# EAGLE board board (EAGLE 8.6.0)
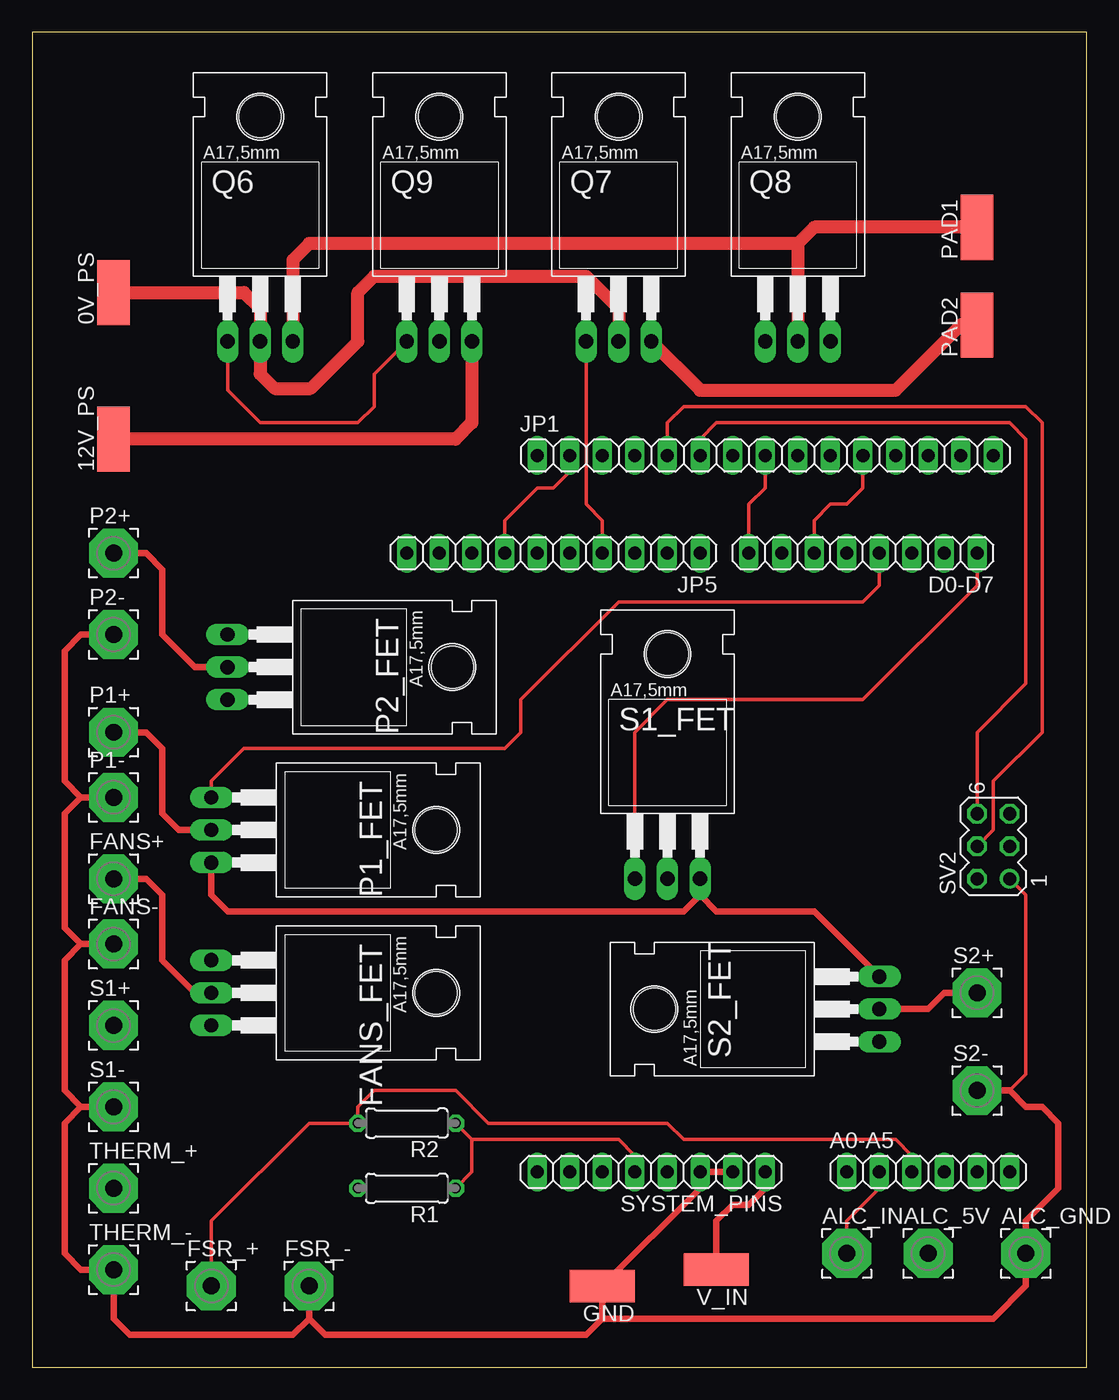
[diagram p0: board, top side]
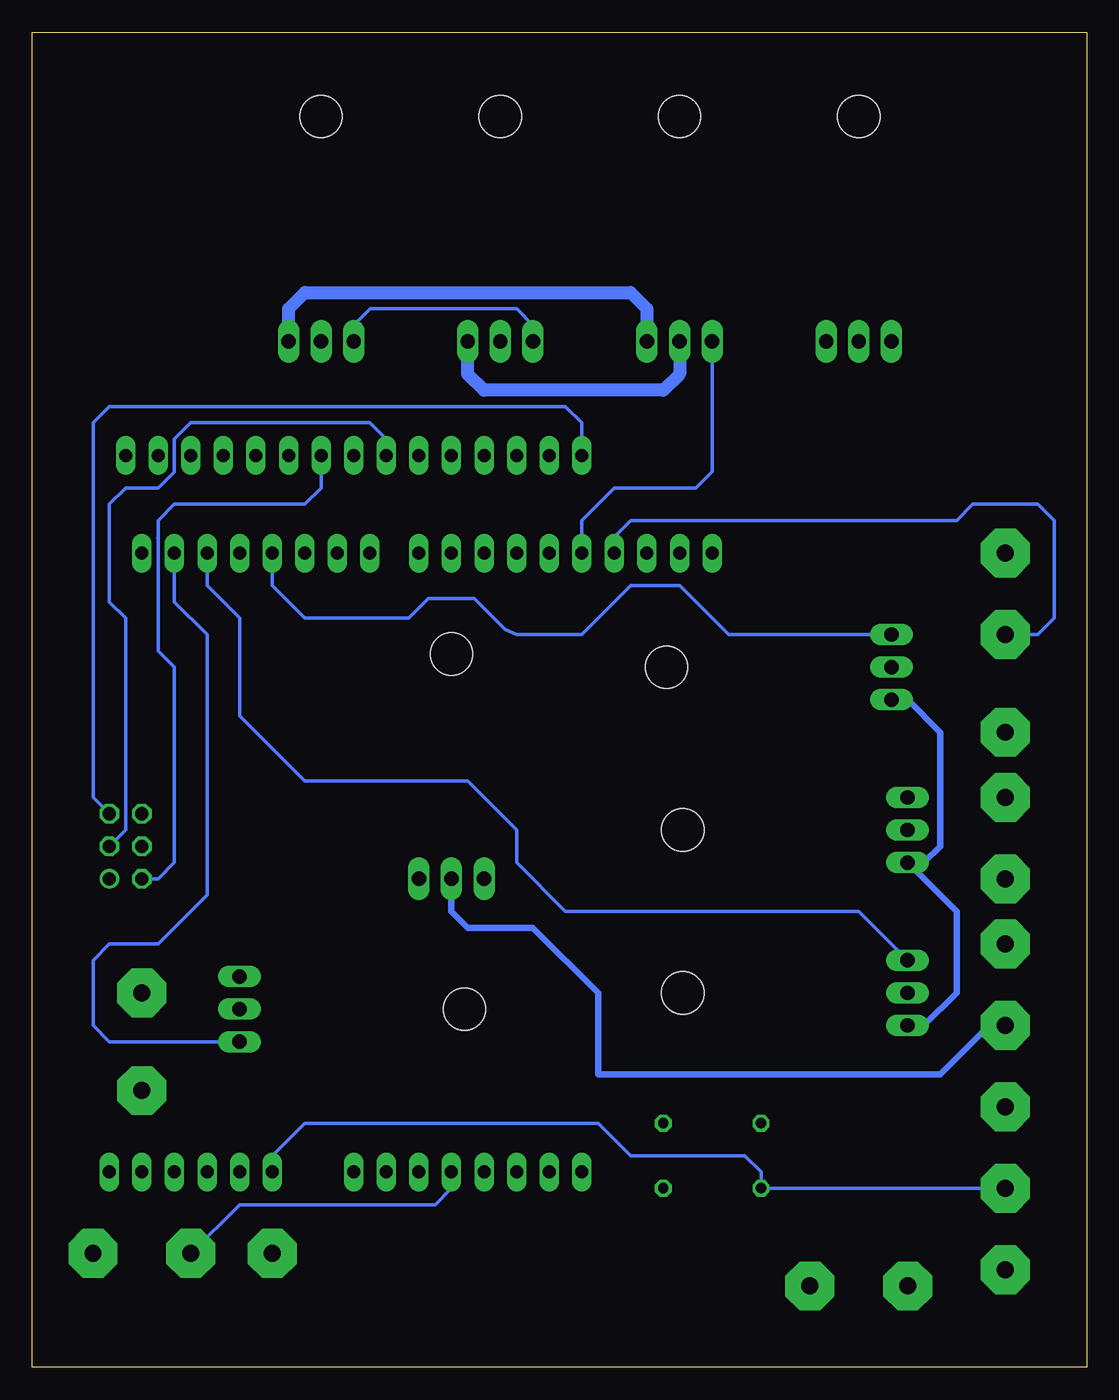
[diagram p1: board, bottom side, seen from below]

Size 82.22 x 104.13 mm. Coordinates in mm from the lower left corner, seen from the top.
Outline: 0,0 82.22,0 82.22,104.13 0,104.13 0,0
Copper layers (1*16): Top 0.035mm / dielectric 1.5mm / Bottom 0.035mm
Design rules "default *": minimum track width 6mil, minimum drill 0.35mm, track to track 15mil, track to pad 15mil, pad to pad 15mil, via to via 15mil, smd to smd 15mil, copper to edge 40mil, drill to drill 6mil, minimum pad ring 10mil, minimum via ring 8mil, stop-mask expansion 4mil, vias tented up to drill 0mil, thermal gap 10mil
Net classes: 0 default: clearance 0.205 mm

## Footprints (pad centres in the part's own frame; a part is rotated, then mirrored left to right if it is on the bottom)
SMD2,54-5,08 = smd 2.54 x 5.08: 1 0,0
1X06 = drill 1.016 long: 1 -6.35,0; 2 -3.81,0; 3 -1.27,0; 4 1.27,0; 5 3.81,0; 6 6.35,0
3,81/1,3 = drill 1.321 pad 3.81 octagon: 1 0,0
1X08 = drill 1.016 long: 1 -8.89,0; 2 -6.35,0; 3 -3.81,0; 4 -1.27,0; 5 1.27,0; 6 3.81,0; 7 6.35,0; 8 8.89,0
TO220 = drill 1.118 long: 1 -2.54,-6.35; 2 0,-6.35; 3 2.54,-6.35 | hole 3.302: 0,11.176
1X15 = drill 1.016 long: 1 -17.78,0; 2 -15.24,0; 3 -12.7,0; 4 -10.16,0; 5 -7.62,0; 6 -5.08,0; 7 -2.54,0; 8 0,0; 9 2.54,0; 10 5.08,0; 11 7.62,0; 12 10.16,0; 13 12.7,0; 14 15.24,0; 15 17.78,0
1X10 = drill 1.016 long: 1 -11.43,0; 2 -8.89,0; 3 -6.35,0; 4 -3.81,0; 5 -1.27,0; 6 1.27,0; 7 3.81,0; 8 6.35,0; 9 8.89,0; 10 11.43,0
0207/7 = drill 0.813 octagon: 1 -3.81,0; 2 3.81,0
MA03-2 = drill 1.016: 1 -2.54,-1.27 | drill 1.016 octagon: 2 -2.54,1.27; 3 0,-1.27; 4 0,1.27; 5 2.54,-1.27; 6 2.54,1.27

## Placement (x,y rotation side)
0V_PS  [SMD2,54-5,08]  6.35,83.82 0 top
12V_PS  [SMD2,54-5,08]  6.35,72.39 0 top
A0-A5  [1X06]  69.85,15.24 0 top
ALC_5V  [3,81/1,3]  69.85,8.89 0 top
ALC_GND  [3,81/1,3]  77.47,8.89 0 top
ALC_IN  [3,81/1,3]  63.5,8.89 0 top
D0-D7  [1X08]  64.77,63.5 180 top
FANS+  [3,81/1,3]  6.35,38.1 0 top
FANS-  [3,81/1,3]  6.35,33.02 0 top
FANS_FET  BUZ10  [TO220]  20.32,29.21 270 top
FSR_+  [3,81/1,3]  13.97,6.35 0 top
FSR_-  [3,81/1,3]  21.59,6.35 0 top
GND  [SMD2,54-5,08]  44.45,6.35 90 top
JP1  [1X15]  57.15,71.12 0 top
JP5  [1X10]  40.64,63.5 180 top
P1+  [3,81/1,3]  6.35,49.53 0 top
P1-  [3,81/1,3]  6.35,44.45 0 top
P1_FET  BUZ10  [TO220]  20.32,41.91 270 top
P2+  [3,81/1,3]  6.35,63.5 0 top
P2-  [3,81/1,3]  6.35,57.15 0 top
P2_FET  BUZ10  [TO220]  21.59,54.61 270 top
PAD1  [SMD2,54-5,08]  73.66,88.9 0 top
PAD2  [SMD2,54-5,08]  73.66,81.28 0 top
Q6  BUZ10  [TO220]  17.78,86.36 0 top
Q7  BUZ10  [TO220]  45.72,86.36 0 top
Q8  BUZ10  [TO220]  59.69,86.36 0 top
Q9  BUZ10  [TO220]  31.75,86.36 0 top
R1  [0207/7]  29.21,13.97 180 top
R2  [0207/7]  29.21,19.05 180 top
S1+  [3,81/1,3]  6.35,26.67 0 top
S1-  [3,81/1,3]  6.35,20.32 0 top
S1_FET  BUZ10  [TO220]  49.53,44.45 0 top
S2+  [3,81/1,3]  73.66,29.21 0 top
S2-  [3,81/1,3]  73.66,21.59 0 top
S2_FET  BUZ10  [TO220]  59.69,27.94 90 top
SV2  [MA03-2]  74.93,40.64 90 top
SYSTEM_PINS  [1X08]  48.26,15.24 180 top
THERM_+  [3,81/1,3]  6.35,13.97 0 top
THERM_-  [3,81/1,3]  6.35,7.62 0 top
V_IN  [SMD2,54-5,08]  53.34,7.62 90 top

## Library data of the parts
0V_PS 12V_PS ALC_5V ALC_GND ALC_IN FANS+ FANS- FSR_+ FSR_- GND P1+ P1- P2+ P2- PAD1 PAD2 S1+ S1- S2+ S2- THERM_+ THERM_- V_IN = wirepad
A0-A5 JP1 JP5 SYSTEM_PINS = pinhead
D0-D7 = pinhead; SPICEPREFIX: X
FANS_FET P1_FET P2_FET Q6-Q9 S1_FET S2_FET = transistor-fet
R1 R2 = resistor
SV2 = con-lstb; OC_FARNELL: unknown; OC_NEWARK: unknown

## Nets
0V_PS: 0V_PS.1 Q6.2 Q7.2
3.3V: R1.1 R2.1 SYSTEM_PINS.5
5V: ALC_5V.1 SYSTEM_PINS.4
12V: FANS_FET.3 P1_FET.3 P2_FET.3 S1_FET.3 S2_FET.3
12V_A: 12V_PS.1 Q8.3 Q9.3
A0: A0-A5.1 R1.2 THERM_+.1
A1: A0-A5.2 ALC_IN.1
A2: A0-A5.3 FSR_+.1 R2.2
A3: A0-A5.4
A4: A0-A5.5
A5: A0-A5.6
D0: D0-D7.1 S1_FET.1
D1: D0-D7.2 S2_FET.1
D2: D0-D7.3 FANS_FET.1
D3: D0-D7.4 P1_FET.1
D4: D0-D7.5 P2_FET.1
D5: D0-D7.6 JP1.11
D6: D0-D7.7
D7: D0-D7.8 JP1.8
D8: JP5.1
D9: JP5.2
D10: JP5.3
D11: JP5.4 Q7.1 Q8.1
D12: JP5.5
D13: JP5.6 Q6.1 Q9.1
GND: ALC_GND.1 FANS-.1 FSR_-.1 GND.1 JP1.2 JP5.7 P1-.1 P2-.1 S1-.1 S2-.1 SV2.1 SYSTEM_PINS.2 SYSTEM_PINS.3 THERM_-.1
MISO: JP1.6 SV2.6
MOSI: JP1.7 SV2.3
N$1: FANS+.1 FANS_FET.2
N$2: S2+.1 S2_FET.2
N$3: S1+.1 S1_FET.2
N$4: P1+.1 P1_FET.2
N$5: P2+.1 P2_FET.2
N$6: PAD1.1 Q6.3 Q8.2
N$7: PAD2.1 Q7.3 Q9.2
N$8: JP1.3
N$10: JP1.4
N$11: JP1.10
N$12: JP1.12
N$13: JP5.8
N$14: JP5.9
N$15: JP5.10
N$16: JP1.13
N$17: JP1.14
N$18: JP1.15
RST: JP1.9 SV2.2
SCK: JP1.5 SV2.4
V_IN: SYSTEM_PINS.1 V_IN.1
VTG: JP1.1 SV2.5

## Tracks (layer width: path | path; a pad name or v marks a point on that pad's centre or on a via)
0V_PS
  Top 1.016: 0V_PS.1 16.51,83.82 17.78,82.55 Q6.2 17.78,77.47 18.92,76.33 21.72,76.33 25.4,80.01 25.4,83.82 26.67,85.09 43.18,85.09 45.72,82.55 Q7.2
3.3V
  Top 0.254: 34.29,17.78 R2.1 | R1.1 34.29,15.24 34.29,17.78 | 34.29,17.78 45.72,17.78 46.99,16.51 SYSTEM_PINS.5
5V
  Bottom 0.254: ALC_5V.1 66.04,12.7 50.8,12.7 49.53,13.97 SYSTEM_PINS.4
12V
  Top 0.508: S2_FET.3 60.96,35.56 53.34,35.56 52.07,36.83 | S1_FET.3 52.07,36.83 | 52.07,36.83 50.8,35.56 15.24,35.56 13.97,36.83 P1_FET.3
  Bottom 0.508: P2_FET.3 13.97,52.07 11.43,49.53 11.43,40.64 12.7,39.37 P1_FET.3 10.16,35.56 10.16,29.21 12.7,26.67 FANS_FET.3
12V_A
  Top 1.016: 12V_PS.1 33.02,72.39 34.29,73.66 Q9.3
  Bottom 1.016: Q8.3 62.23,82.55 60.96,83.82 35.56,83.82 34.29,82.55 Q9.3
A0
  Bottom 0.254: THERM_+.1 R1.2 25.4,15.24 26.67,16.51 35.56,16.51 38.1,19.05 60.96,19.05 63.5,16.51 A0-A5.1
A1
  Top 0.254: ALC_IN.1 63.5,11.43 66.04,13.97 A0-A5.2
A2
  Top 0.254: FSR_+.1 13.97,11.43 21.59,19.05 R2.2 25.4,20.32 26.67,21.59 33.02,21.59 35.56,19.05 49.53,19.05 50.8,17.78 67.31,17.78 68.58,16.51 A0-A5.3
D0
  Top 0.254: S1_FET.1 46.99,49.53 49.53,52.07 64.77,52.07 73.66,60.96 D0-D7.1
D1
  Bottom 0.254: D0-D7.2 71.12,59.69 68.58,57.15 68.58,36.83 72.39,33.02 76.2,33.02 77.47,31.75 77.47,26.67 76.2,25.4 S2_FET.1
D2
  Bottom 0.254: FANS_FET.1 17.78,35.56 40.64,35.56 44.45,39.37 44.45,41.91 48.26,45.72 60.96,45.72 66.04,50.8 66.04,58.42 68.58,60.96 D0-D7.3
D3
  Top 0.254: D0-D7.4 66.04,60.96 64.77,59.69 45.72,59.69 38.1,52.07 38.1,49.53 36.83,48.26 16.51,48.26 13.97,45.72 P1_FET.1
D4
  Bottom 0.254: P2_FET.1 27.93,57.15 29.2,58.42 | 29.2,58.42 29.71,58.93 | D0-D7.5 63.5,60.96 60.96,58.42 52.84,58.42 51.32,59.94 47.74,59.94 45.33,57.54 44.45,57.15 39.37,57.15 35.56,60.96 31.75,60.96 29.2,58.42
D5
  Top 0.254: D0-D7.6 60.96,66.04 62.23,67.31 63.5,67.31 64.77,68.58 JP1.11
D7
  Top 0.254: D0-D7.8 55.88,67.31 57.15,68.58 JP1.8
D11
  Top 0.254: JP5.4 44.45,66.04 43.18,67.31 Q7.1
  Bottom 0.254: Q8.1 57.15,81.28 55.85,82.58 45.01,82.58 44.98,82.55 44.45,82.55 43.18,81.28 Q7.1
D13
  Top 0.254: Q9.1 26.67,77.47 26.67,74.93 25.4,73.66 17.78,73.66 15.24,76.2 Q6.1
  Bottom 0.254: JP5.6 39.37,66.04 36.83,68.58 30.48,68.58 29.21,69.85 Q9.1
GND
  Top 0.254: 76.2,21.59 77.47,22.86 77.47,36.83 SV2.1 | JP5.7 36.83,66.04 39.37,68.58 40.64,68.58 41.91,69.85 JP1.2
  Top 0.508: S2-.1 76.2,21.59 77.47,20.32 78.74,20.32 80.01,19.05 80.01,13.97 77.47,11.43 ALC_GND.1 77.47,6.35 74.93,3.81 44.45,3.81 | P2-.1 3.81,57.15 2.54,55.88 2.54,45.72 3.81,44.45 | 3.81,44.45 P1-.1 | 3.81,44.45 2.54,43.18 2.54,34.29 3.81,33.02 | 3.81,33.02 FANS-.1 | 3.81,33.02 2.54,31.75 2.54,21.59 3.81,20.32 | 3.81,20.32 S1-.1 | 3.81,20.32 2.54,19.05 2.54,8.89 3.81,7.62 THERM_-.1 | 7.62,7.62 THERM_-.1 | THERM_-.1 6.35,3.81 7.62,2.54 20.32,2.54 21.59,3.81 | 21.59,3.81 FSR_-.1 | 21.59,3.81 22.86,2.54 43.18,2.54 44.45,3.81 | SYSTEM_PINS.2 SYSTEM_PINS.3 52.07,13.97 GND.1 44.45,3.81
  Bottom 0.254: P2-.1 3.81,57.15 2.54,58.42 2.54,66.04 3.81,67.31 8.89,67.31 10.16,66.04 35.56,66.04 36.83,64.77 JP5.7 | 41.91,69.85 JP1.2
MISO
  Top 0.254: SV2.6 73.66,49.53 77.47,53.34 77.47,72.39 76.2,73.66 53.34,73.66 52.07,72.39 JP1.6
MOSI
  Bottom 0.152: 76.1,40.79 SV2.3
  Bottom 0.254: SV2.3 74.93,41.91 74.93,58.42 76.2,59.69 76.2,67.31 74.93,68.58 72.37,68.58 71.12,69.83 71.12,72.41 70.38,73.15 70.36,73.15 69.85,73.66 55.88,73.66 54.61,72.39 JP1.7
N$1
  Top 0.508: FANS_FET.2 12.7,29.21 10.16,31.75 10.16,36.83 8.89,38.1 FANS+.1
N$2
  Top 0.508: S2+.1 71.12,29.21 69.85,27.94 S2_FET.2
N$3
  Bottom 0.508: S1+.1 7.62,26.67 11.43,22.86 38.1,22.86 38.1,29.21 43.18,34.29 48.26,34.29 49.53,35.56 S1_FET.2
N$4
  Top 0.508: P1_FET.2 11.43,41.91 10.16,43.18 10.16,48.26 8.89,49.53 P1+.1
N$5
  Top 0.508: P2_FET.2 12.7,54.61 10.16,57.15 10.16,62.23 8.89,63.5 P2+.1
N$6
  Top 1.016: PAD1.1 60.96,88.9 59.69,87.63 | 59.69,87.63 Q8.2 | 59.69,87.63 21.59,87.63 20.32,86.36 Q6.3
N$7
  Top 1.016: PAD2.1 72.39,81.28 67.31,76.2 62.23,76.2 52.07,76.2 Q7.3
  Bottom 1.016: Q9.2 31.75,77.47 33.02,76.2 46.99,76.2 48.26,77.47 Q7.3
RST
  Bottom 0.152: 59.84,71.07 JP1.9 | 73.66,38.15 SV2.2
  Bottom 0.254: JP1.9 59.69,68.58 60.96,67.31 71.12,67.31 72.39,66.04 72.39,64.77 | 72.44,64.72 72.39,64.77 | SV2.2 72.39,38.1 71.12,39.37 71.12,54.61 72.39,55.88 72.39,64.77
SCK
  Top 0.152: 73.66,40.79 SV2.4
  Top 0.254: SV2.4 74.93,41.91 74.93,45.72 78.74,49.53 78.74,73.66 77.47,74.93 50.8,74.93 49.53,73.66 JP1.5
V_IN
  Top 0.508: SYSTEM_PINS.1 57.15,13.97 55.88,12.7 54.61,12.7 53.34,11.43 V_IN.1
VTG
  Bottom 0.254: JP1.1 39.37,73.66 40.64,74.93 76.2,74.93 77.47,73.66 77.47,44.45 SV2.5